# EAGLE board IBUS GPS BME Sensor v33 (EAGLE 9.7.0)
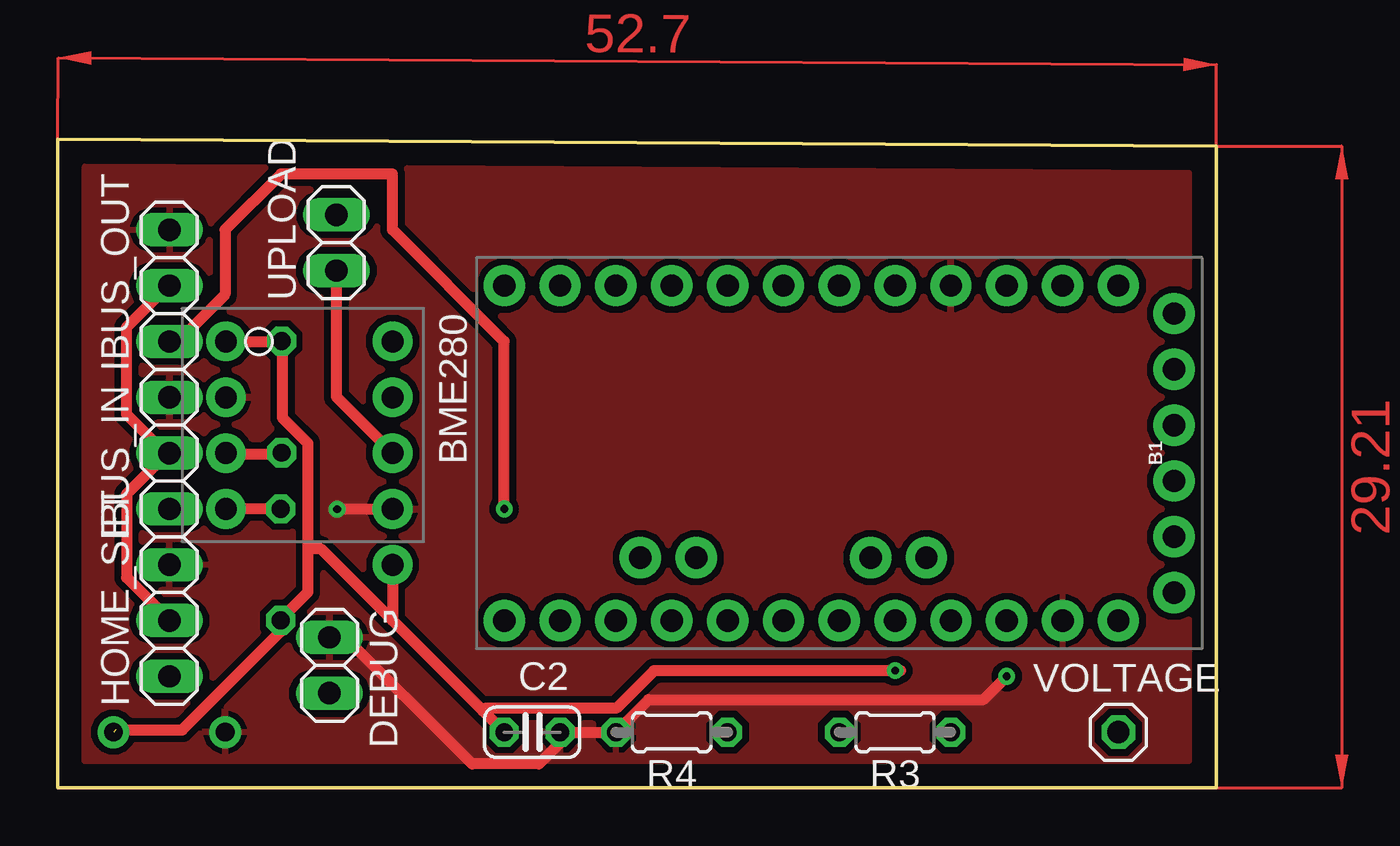
[diagram p0: board, top side]
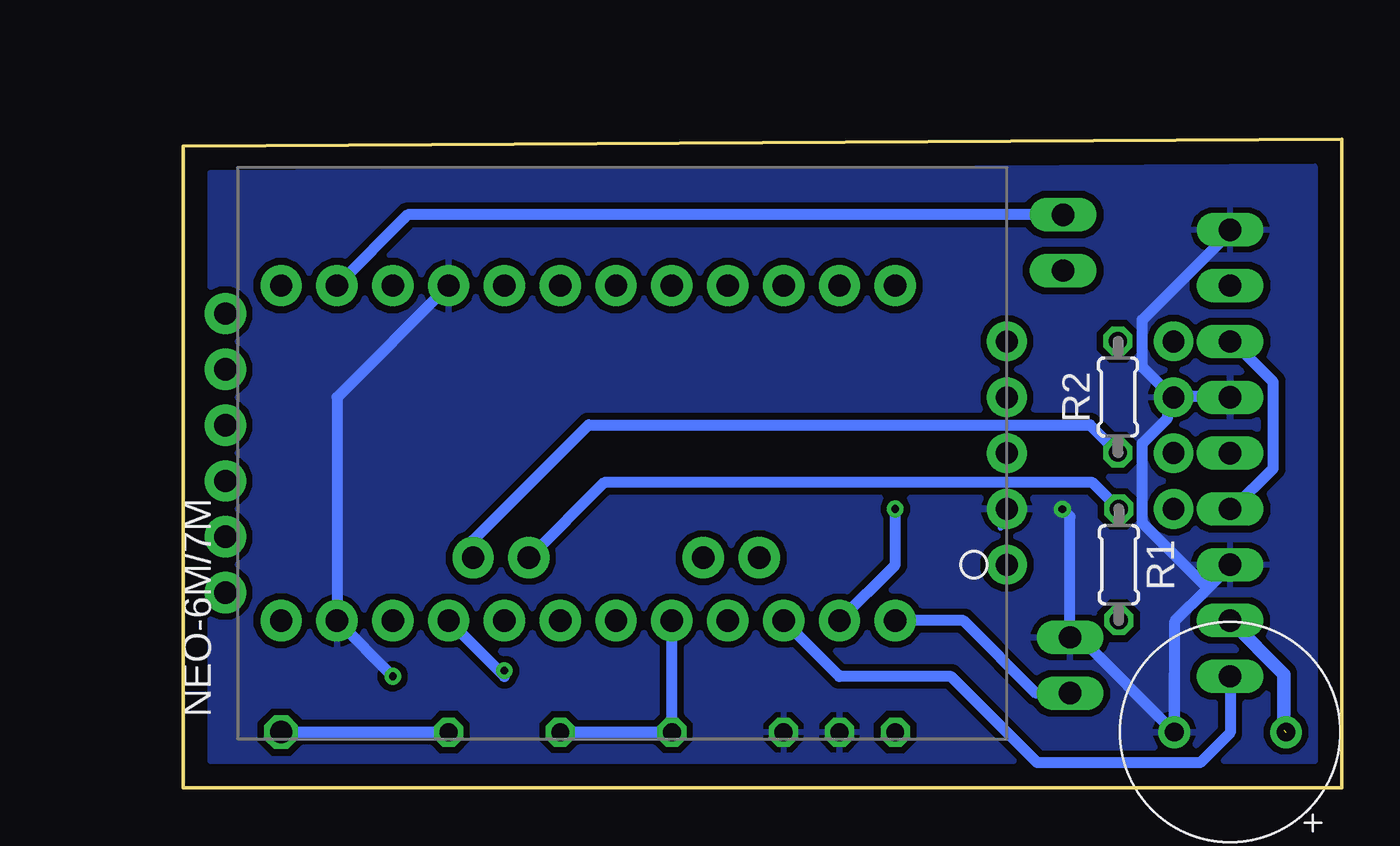
[diagram p1: board, bottom side, seen from below]

Size 52.7 x 29.52 mm. Coordinates in mm from the lower left corner, seen from the top.
Outline: 0,0 52.7,0 52.7,29.21 0.01,29.52 0,0
Copper layers (1*16): Top / Bottom
Stack-up Default Layer Stack: Top SilkScreen Epoxy Ink / Top SolderMask SR:Green 0.0254mm Dk 4.3 / Top Surface Finish Lead-Free 0.02mm / Top CuFoil:007 0.035mm / Dielectric-1 User Defined 1.5mm / Bottom CuFoil:007 0.035mm / Bottom Surface Finish Lead-Free 0.02mm / Bottom SolderMask SR:Green 0.0254mm Dk 4.3 / Bottom SilkScreen Epoxy Ink
Design rules: minimum copper width 10mil, copper clearance wire_polygon to wire_polygon 6mil, copper clearance wire_polygon to pad_smd 6mil, copper clearance wire_polygon to via 6mil, copper clearance pad_smd to pad_smd 6mil, copper clearance pad_smd to via 6mil, copper clearance via to via 6mil, copper clearance smd to pad (same net) 6mil, copper clearance smd to via (same net) 6mil, copper clearance smd to smd (same net) 6mil, dimension clearance 40mil, via restrict clearance 0mil, restrict clearance 0mil

## Footprints (pad centres in the part's own frame; a part is rotated, then mirrored left to right if it is on the bottom)
ARDUINO_PRO_MINI = drill 1.016 pad 1.88: 1 -7.62,12.7; 2 -7.62,10.16; 3 -7.62,7.62; 4 -7.62,5.08; 5 -7.62,2.54; 6 -7.62,0; 7 -7.62,-2.54; 8 -7.62,-5.08; 9 -7.62,-7.62; 10 -7.62,-10.16; 11 -7.62,-12.7; 12 -7.62,-15.24; 13 7.62,-15.24; 14 7.62,-12.7; 15 7.62,-10.16; 16 7.62,-7.62; 17 7.62,-5.08; 18 7.62,-2.54; 19 7.62,0; 20 7.62,2.54; 21 7.62,5.08; 22 7.62,7.62; 23 7.62,10.16; 24 7.62,12.7; A4 4.763,1.429; A5 4.763,3.969; A6 4.763,-9.049; A7 4.763,-6.509; BLK -6.35,15.24; GND -3.81,15.24; GRN 6.35,15.24; RXI 1.27,15.24; TXO 3.81,15.24; VCC -1.27,15.24
CAPPRD508W65D1000H1100B = drill 0.85 pad 1.45: 1 -2.54,0; 2 2.54,0
C025-024X044 = drill 0.813 octagon: 1 -1.27,0; 2 1.27,0
1X02 = drill 1.016 long: 1 -1.27,0; 2 1.27,0
1X03 = drill 1.016 long: 1 -2.54,0; 2 0,0; 3 2.54,0
0204/5 = drill 0.813 octagon: 1 -2.54,0; 2 2.54,0
BME280_MODULE_5V = drill 1 pad 1.8: GND 2.54,0; SCL 5.08,0; SDA 7.62,0; VIN 0,0
NEO6M_GPS_MODULE = drill 1 pad 1.8: GND -2.54,0; PPS 5.08,0; RXD 2.54,0; TXD 0,0; VCC -5.08,0
1X01 = drill 1.016 octagon: 1 0,0

## Placement (x,y rotation side)
B1  ARDUINO_PRO_MINI  [ARDUINO_PRO_MINI]  35.56,15.24 270 top
C1  4700uF/6.3V  [CAPPRD508W65D1000H1100B]  5.08,2.54 180 bottom
C2  100nF  [C025-024X044]  21.59,2.54 0 top
DEBUG  [1X02]  12.37,5.58 270 top
HOME_SET  [1X03]  5.08,7.62 90 top
IBUS_IN  [1X03]  5.08,15.24 90 top
IBUS_OUT  [1X03]  5.08,22.86 90 top
R1  4.7K  [0204/5]  10.15,10.16 270 bottom
R2  4.7K  [0204/5]  10.18,17.8 90 bottom
R3  180K  [0204/5]  38.1,2.54 180 top
R4  10K  [0204/5]  27.94,2.54 180 top
U1  BME280_MODULE_5V_STD  [BME280_MODULE_5V]  7.66,20.32 270 top
U2  NEO6M_GPS_MODULE  [NEO6M_GPS_MODULE]  15.24,15.24 90 bottom
UPLOAD  [1X02]  12.68,24.82 90 top
VOLTAGE  [1X01]  48.26,2.54 0 top

## Library data of the parts
B1 = SparkFun-Boards
C1 = Capacitor; CATEGORY: Capacitor
C2 = rcl; SPICEPREFIX: C
DEBUG HOME_SET IBUS_IN IBUS_OUT UPLOAD VOLTAGE = pinhead
R1-R4 = rcl; SPICEPREFIX: R
U1 = BME280_Module_5V
U2 = NEO-6M-7M

## Nets
+5V [PWR]: B1.21 C1.1 C2.1 HOME_SET.2 IBUS_IN.2 IBUS_OUT.2 R1.2 R2.2 U1.VIN U2.VCC
GND [GND]: B1.4 B1.23 C1.2 C2.2 DEBUG.1 HOME_SET.3 IBUS_IN.3 IBUS_OUT.3 R4.2 U1.GND U2.GND
IBUS: B1.14 IBUS_IN.1 IBUS_OUT.1
N$2: B1.13 DEBUG.2
N$3: B1.A4 R1.1 U1.SDA
N$4: B1.A5 R2.1 U1.SCL
N$5: U2.TXD UPLOAD.1
N$7: B1.2 UPLOAD.2
N$11: B1.15 HOME_SET.1
N$12: B1.17 R3.2 R4.1
N$13: R3.1 VOLTAGE.1
RAW: B1.24

## Tracks (layer width: path | path; a pad name or v marks a point on that pad's centre or on a via)
+5V  (via drill 0.35)  (1 unrouted)
  Top 0.508: U1.VIN 7.76,20.31 10.07,20.31 R2.2 10.24,20.14 10.24,16.84 11.39,15.68 11.39,10.9 | C1.1 2.64,2.64 5.67,2.64 10.15,7.12 R1.2 10.24,7.76 11.39,8.91 11.39,10.9 | 19.36,3.5 C2.1 | HOME_SET.2 4.95,7.76 3.14,9.58 3.14,13.37 4.95,15.19 IBUS_IN.2 4.79,15.35 3.14,17 3.14,20.97 4.95,22.78 IBUS_OUT.2 | 15.24,7.62 11.96,10.9 11.39,10.9 | 15.24,7.62 19.36,3.5 | 38.36,5.34 v38.1,5.34 27.13,5.34 25.43,3.63 19.48,3.63 19.36,3.5 | U2.VCC 15.24,7.62
  Bottom 0.508: B1.21 38.1,5.08 v38.1,5.34
  Bottom 0.61: HOME_SET.2 2.64,5.18 2.64,2.64
GND  (via drill 0.35)
  Top 0.508: 7.59,17.83 U1.GND | DEBUG.1 12.22,6.77 12.7,7.25 18.86,1.09 21.9,1.09 22.86,2.05 C2.2 R4.2 26.87,4.01 42.11,4.01 43.18,5.08 | 12.75,12.72 v12.71,12.69 12.72,12.7 U2.GND
  Bottom 0.254: 15.54,11.84 14.68,12.69
  Bottom 0.508: 7.59,17.83 5.12,17.83 IBUS_IN.3 | IBUS_OUT.3 5.12,25.26 9.08,21.3 9.08,19.15 7.76,17.83 U1.GND 7.92,17.67 7.92,16.84 9.08,15.68 9.08,12.05 6.11,9.08 | C1.2 7.62,5.24 | 6.11,9.08 7.59,7.59 7.59,2.64 C1.2 | 6.11,9.08 5.12,10.07 HOME_SET.3 | 40.95,22.86 B1.4 | 40.78,22.78 B1.4 | v12.71,12.69 12.37,12.35 DEBUG.1 11.93,6.85 C1.2 | B1.4 45.72,17.78 B1.23 43.18,5.08
  pour Bottom (isolate 0.305): 52.07,28.57 52.07,0.64 0.64,0.64 0.64,28.57
  pour Top (isolate 0.305): 52.07,28.57 52.07,0.64 0.64,0.64 0.64,28.57
IBUS  (via drill 0.35)
  Top 0.508: v20.32,12.7 20.32,20.32 15.24,25.4 15.24,27.94 10.16,27.94 7.62,25.4 7.62,22.46 5.48,20.32 IBUS_OUT.1
  Bottom 0.508: IBUS_IN.1 4.95,12.71 3.14,14.53 3.14,18.49 4.95,20.31 IBUS_OUT.1 | B1.14 20.32,10.16 v20.32,12.7
N$1  (via drill 0.35)
  other vias: 43.18,5.08
N$2
  Bottom 0.508: DEBUG.2 13.91,4.31 17.22,7.62 B1.13
N$3
  Top 0.508: R1.1 10.07,12.71 7.76,12.71 U1.SDA
  Bottom 0.508: R1.1 11.35,13.9 33.57,13.9 B1.A4
N$4
  Top 0.508: R2.1 10.07,15.19 7.76,15.19 U1.SCL
  Bottom 0.508: R2.1 11.46,16.53 34.27,16.53 39.53,11.27 B1.A5
N$5
  Top 0.508: U2.TXD 12.68,17.8 UPLOAD.1
N$7
  Bottom 0.508: UPLOAD.2 42.49,26.09 B1.2
N$11
  Bottom 0.508: HOME_SET.1 5.08,2.52 6.44,1.15 13.85,1.15 17.78,5.08 22.86,5.08 B1.15
N$12
  Bottom 0.508: B1.17 R4.1 R3.2
N$13
  Bottom 0.508: R3.1 VOLTAGE.1
(copper drawn outside any net)
  shapes: Top area x2